# EAGLE board weight_sens (EAGLE 6.5.0)
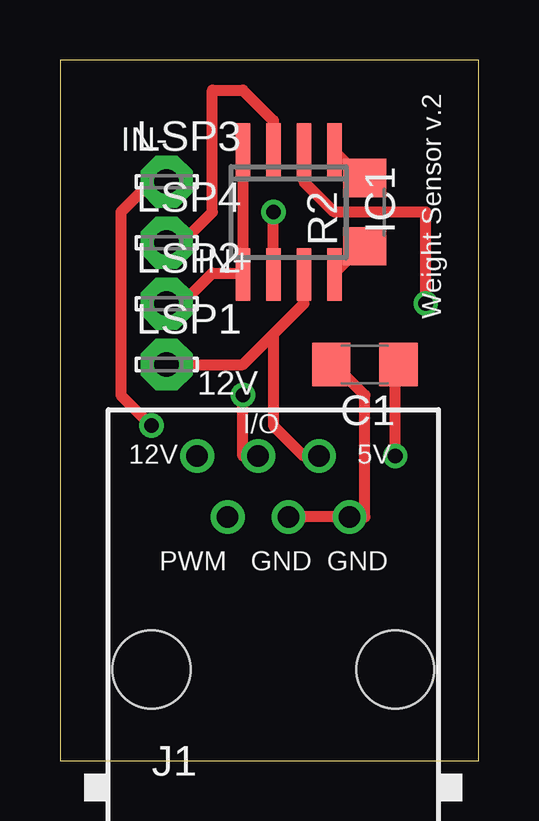
[diagram p0: board, top side]
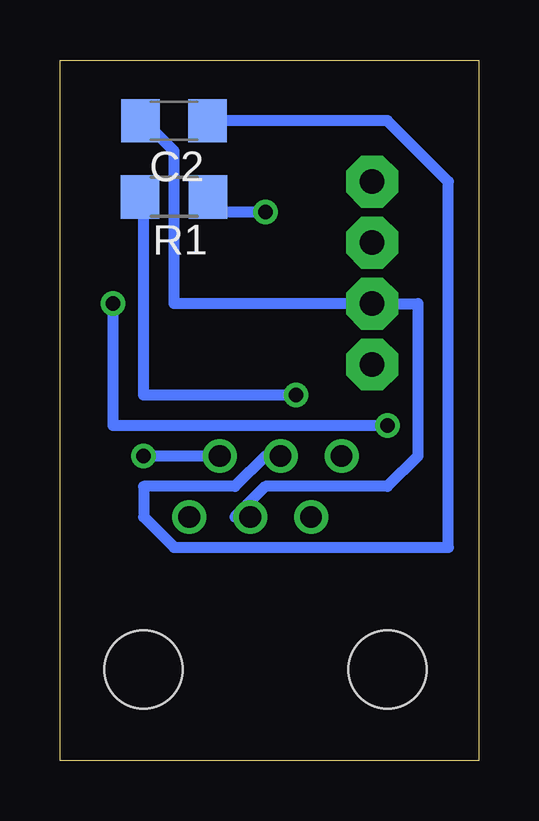
[diagram p1: board, bottom side, seen from below]

Size 17.45 x 29.2 mm. Coordinates in mm from the lower left corner, seen from the top.
Outline: 0,0 17.45,0 17.45,29.2 0,29.2 0,0
Copper layers (1*16): Top 0.035mm / dielectric 1.5mm / Bottom 0.035mm
Design rules "default": minimum track width 10mil, minimum drill 24mil, track to track 8mil, track to pad 8mil, pad to pad 8mil, via to via 8mil, smd to smd 8mil, copper to edge 40mil, drill to drill 8mil, minimum pad ring 10mil, minimum via ring 8mil, stop-mask expansion 4mil, vias tented up to drill 0mil, thermal gap 10mil
Net classes: 0 default: width 0.457 mm

## Footprints (pad centres in the part's own frame; a part is rotated, then mirrored left to right if it is on the bottom)
C1206 = smd 1.6 x 1.8: 1 -1.4,0; 2 1.4,0
SO8 = smd 0.6 x 2.2: 1 -1.905,-2.6; 2 -0.635,-2.6; 3 0.635,-2.6; 4 1.905,-2.6; 5 1.905,2.6; 6 0.635,2.6; 7 -0.635,2.6; 8 -1.905,2.6
RJ12-STRAIGHT = drill 0.9 pad 1.4: +5V 1.905,8.89; +12V -3.175,8.89; GND1 3.175,6.35; GND2 0.635,6.35; I/O -0.635,8.89; PWM -1.905,6.35 | hole 3.251: -5.08,0; 5.08,0
LSP10 = drill 1.016 pad 2.159 octagon: MP 0,0
R1206 = smd 1.6 x 1.803: 1 -1.422,0; 2 1.422,0

## Placement (x,y rotation side)
C1  100nF  [C1206]  12.7,16.51 180 top
C2  330nF  [C1206]  12.7,26.67 180 bottom
IC1  AD8223  [SO8]  9.53,22.86 180 top
J1  RJ12STRAIGHT  [RJ12-STRAIGHT]  8.89,3.81 0 top
LSP1  LSP10  [LSP10]  4.45,16.51 0 top
LSP2  LSP10  [LSP10]  4.45,19.05 0 top
LSP3  LSP10  [LSP10]  4.45,24.13 0 top
LSP4  LSP10  [LSP10]  4.45,21.59 0 top
R1  100  [R1206]  12.7,23.5 180 bottom
R2  300  [R1206]  12.7,22.86 90 top

## Library data of the parts
C1 C2 = rcl
IC1 = analog-devices; MPN: AD620AR; OC_FARNELL: 1464424; OC_NEWARK: 05F7109
J1 = lpatiny
LSP1-LSP4 = solpad
R1 R2 = resistor

## Nets
N$1: IC1.1 R2.2
N$2: IC1.8 R2.1
N$4: IC1.2 LSP3.MP
N$5: IC1.6 R1.1
N$6: C1.2 C2.2 IC1.4 IC1.5 J1.GND1 J1.GND2 LSP2.MP
N$8: IC1.3 LSP4.MP
N$9: C1.1 IC1.7 J1.+5V LSP1.MP
SIGN: C2.1 J1.I/O R1.2

## Tracks (layer width: path | path; a pad name or v marks a point on that pad's centre or on a via)
N$1
  Top 0.457: R2.2 12.7,24.13 11.43,25.4 IC1.1
N$2
  Top 0.457: R2.1 12.7,21.59 11.43,20.32 IC1.8
N$4  (via drill 0.61)
  Top 0.457: v15.24,19.05 15.24,22.86 11.43,22.86 10.16,24.13 10.16,25.4 IC1.2 | v3.81,13.97 2.54,15.24 2.54,22.86 3.81,24.13 LSP3.MP
  Bottom 0.457: v15.24,19.05 15.24,13.97 v3.81,13.97
N$5  (via drill 0.61)
  Top 0.457: v8.89,22.86 8.89,20.32 IC1.6
  Bottom 0.457: v8.89,22.86 11.43,22.86 R1.1
N$6
  Top 0.457: C1.2 11.43,16.51 12.7,15.24 12.7,10.16 J1.GND1 11.43,10.16 10.16,10.16 J1.GND2 | 7.62,20.32 7.62,25.4 IC1.4 | 7.62,20.32 IC1.5 7.62,20.32 | 7.62,20.32 6.35,20.32 5.08,19.05 LSP2.MP
  Bottom 0.457: C2.2 13.97,26.67 12.7,25.4 12.7,19.05 5.08,19.05 LSP2.MP 3.81,19.05 2.54,19.05 2.54,12.7 3.81,11.43 8.89,11.43 10.16,10.16 J1.GND2
N$8
  Top 0.457: IC1.3 8.89,26.67 7.62,27.94 6.35,27.94 6.35,22.86 5.08,21.59 LSP4.MP | IC1.3 8.89,25.4 IC1.3
N$9  (via drill 0.61)
  Top 0.457: v13.97,12.7 13.97,16.51 C1.1 | IC1.7 10.16,19.05 8.89,17.78 | IC1.7 10.16,20.32 IC1.7 | 8.89,17.78 7.62,16.51 5.08,16.51 LSP1.MP | 8.89,17.78 8.89,13.97 10.16,12.7 J1.+5V
  Bottom 0.457: v13.97,12.7 11.43,12.7 J1.+5V
SIGN  (via drill 0.61)
  Top 0.457: v7.62,15.24 7.62,12.7 J1.I/O
  Bottom 0.457: C2.1 3.81,26.67 1.27,24.13 1.27,8.89 12.7,8.89 13.97,10.16 13.97,11.43 10.16,11.43 8.89,12.7 J1.I/O | C2.1 11.43,26.67 C2.1 | v7.62,15.24 13.97,15.24 13.97,22.86 R1.2

## Text on the board
tSilk: IN- | IN+ | 12V
_tsilk: Weight Sensor v.2